# Altium PCB hub_6.PcbDoc
Units mm, origin at the board's own origin, x right, y up, seen from the top; angles counter-clockwise.
Board outline 152.4 x 101.6 mm, 2 copper layers (Top Layer, Bottom Layer); 138 components, 100 nets, 461 pads, 145 vias.
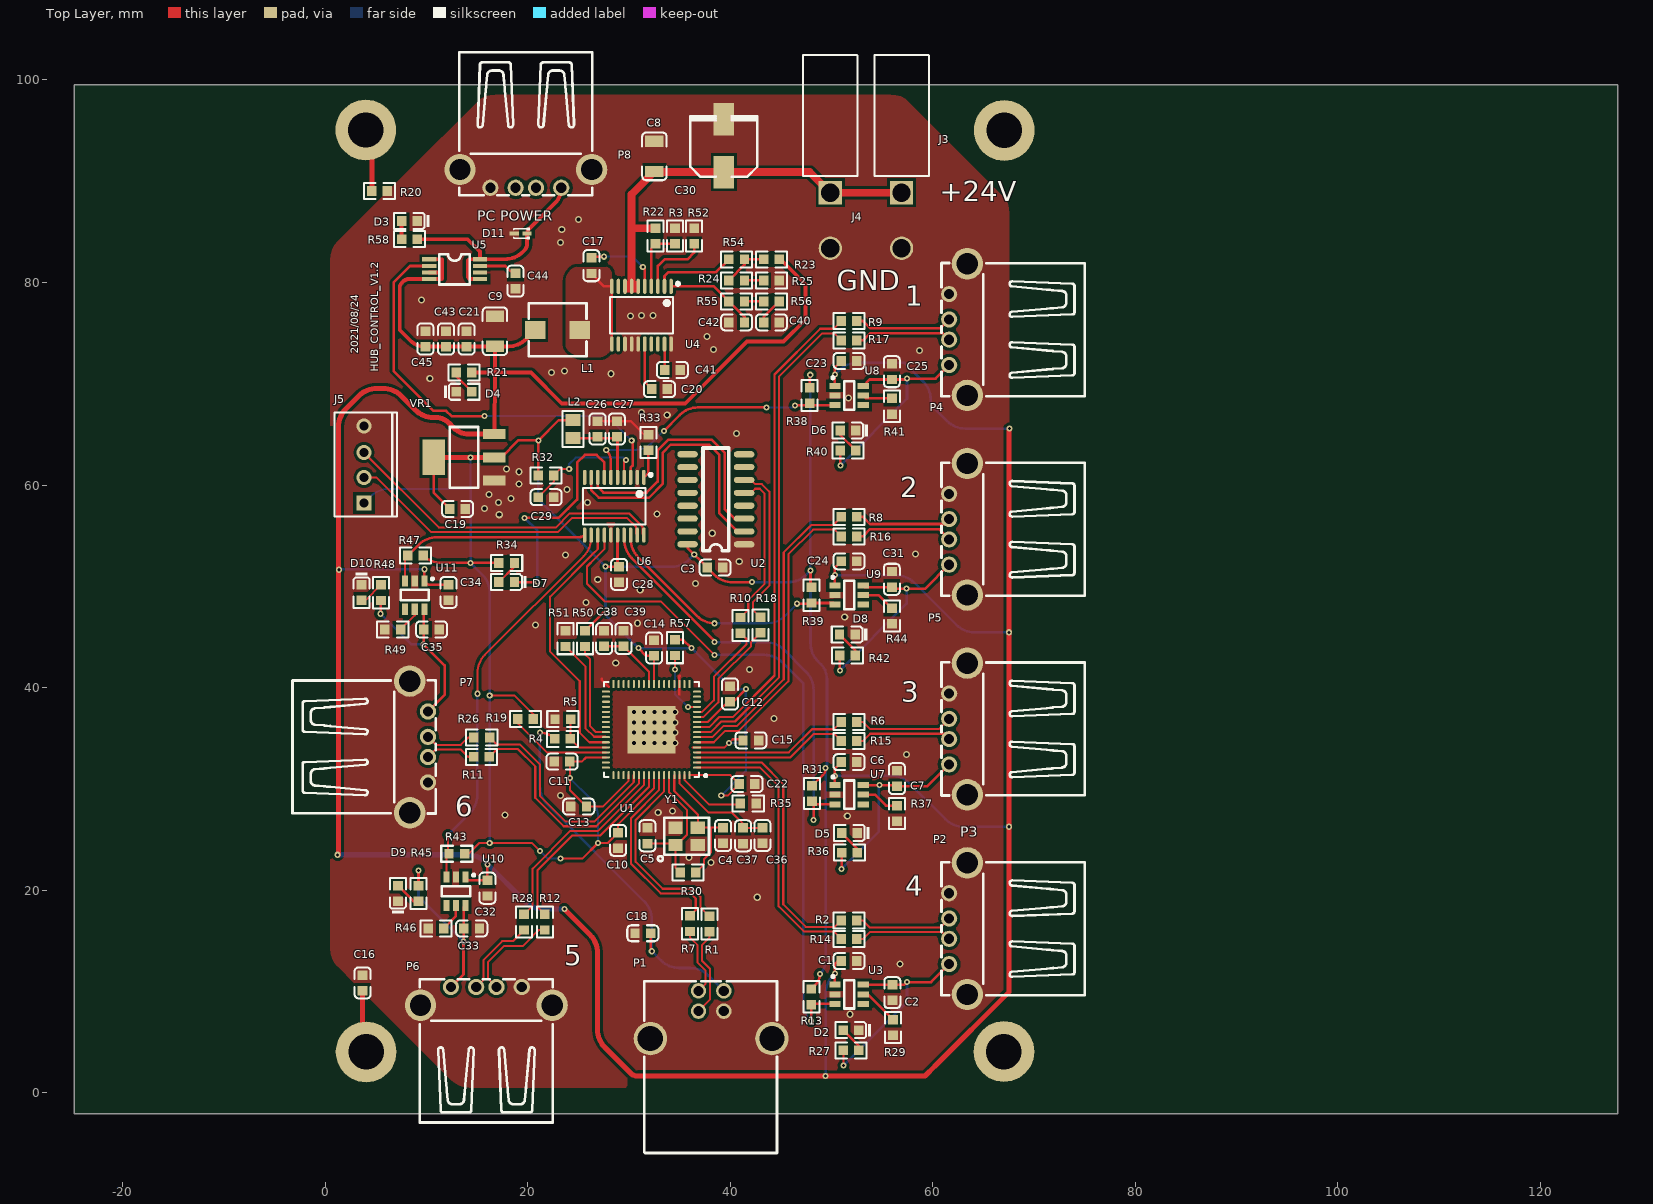
[diagram p0: Top Layer view]
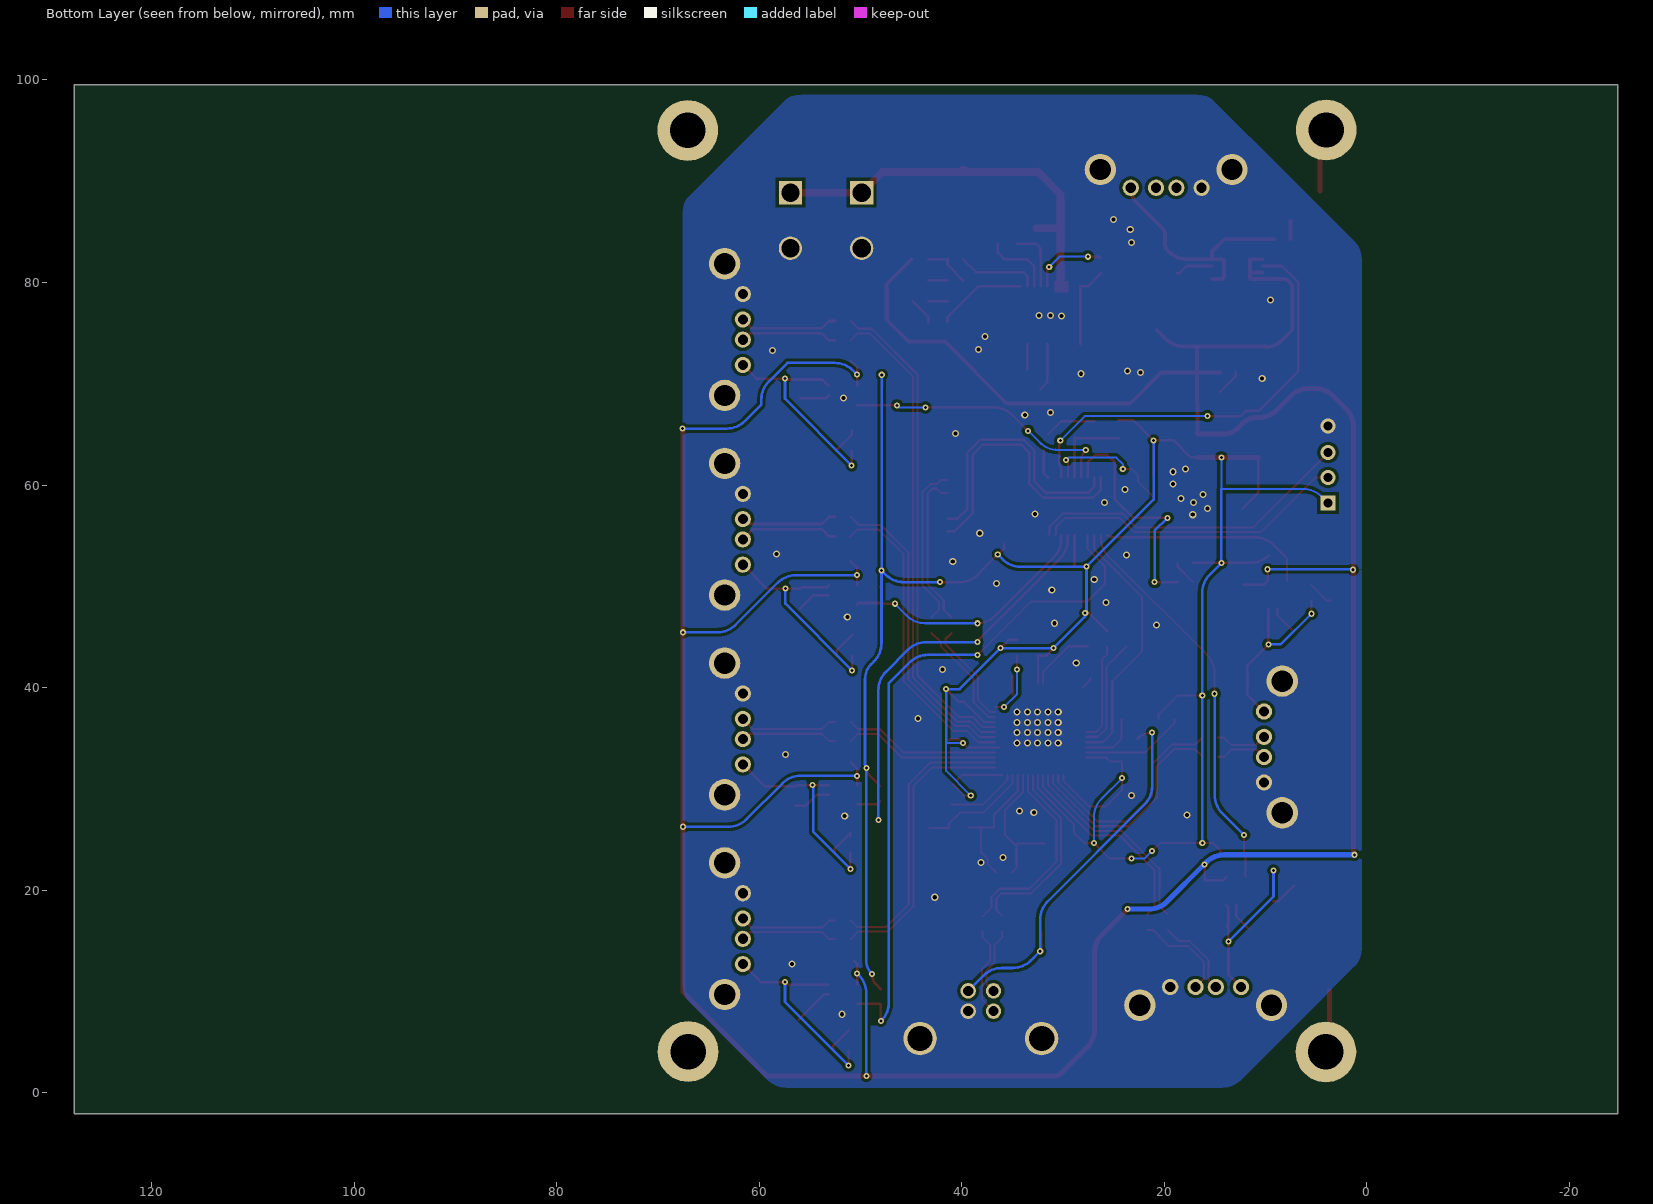
[diagram p1: Bottom Layer view, seen from below]
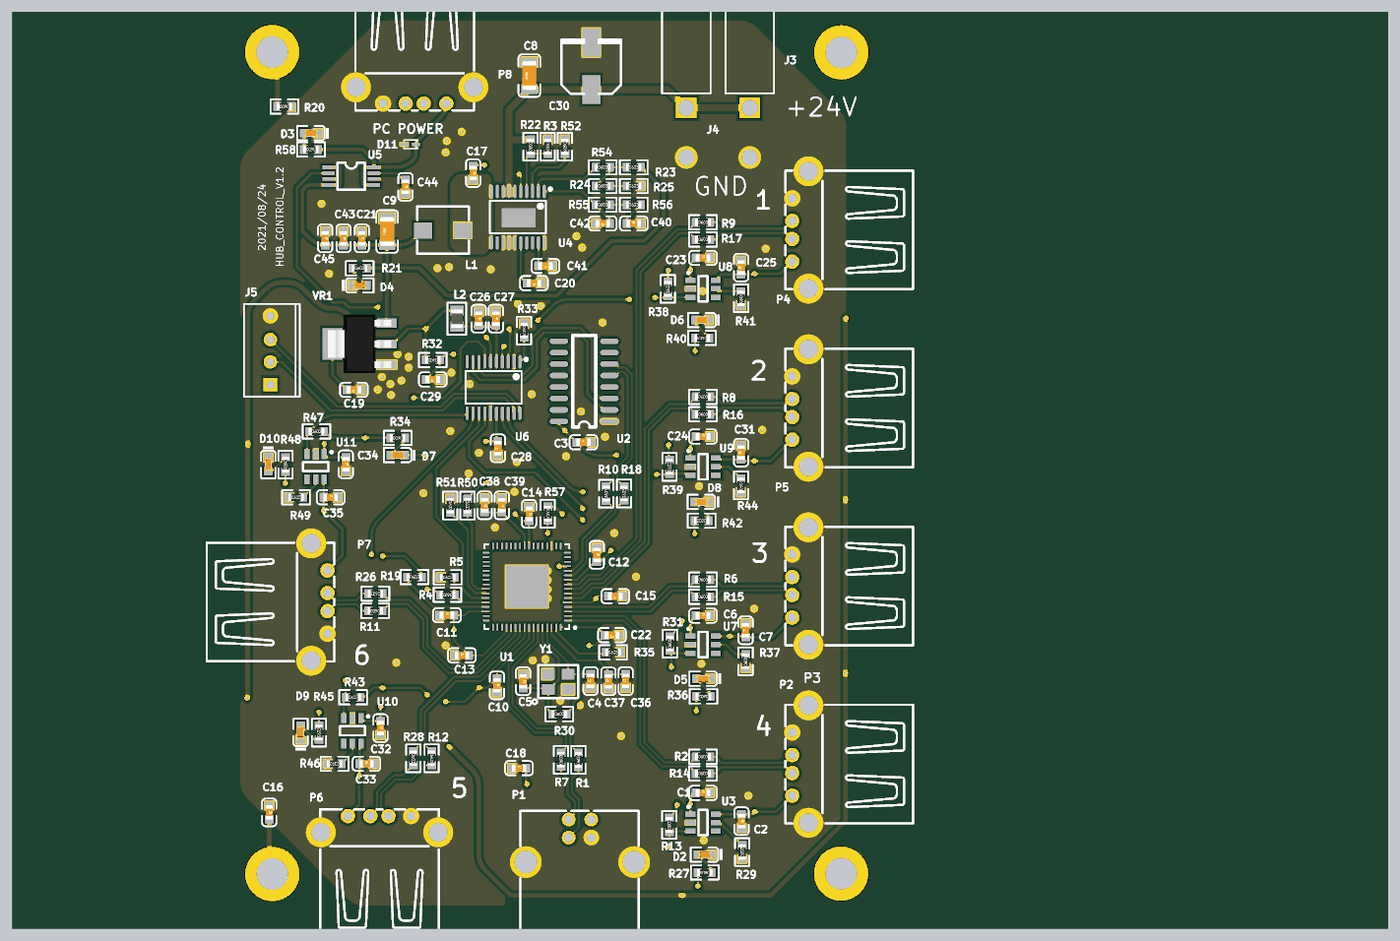
[diagram p2: 3D render of the assembled board from above, using the file's embedded part models]

## Layer stack, top to bottom
Top Layer: signal copper 0.0356
Dielectric: dielectric 0.32, FR-4, Dk 4.8
Bottom Layer: signal copper 0.0356

## Board outline
-24.765,-2.057 127.635,-2.057 127.635,99.543 -24.765,99.543

## Design rules (kind name [scope] priority, off if disabled: settings)
Clearance [InPolygon] p1: gap=0.305
Clearance Clearance_1 [All] p2: gap=0.254
PolygonConnect [All] p1: connectstyle=Direct reliefconductorwidth=0.254 reliefentries=2 polygonreliefangle="90 Angle"
RoutingVias [All] p1: holewidth=0.3 width=0.6 viastyle="Through Hole" minholewidth=0.3 minwidth=0.6 maxholewidth=0.711 maxwidth=1.27
SilkscreenOverComponentPads [All] p1: minsilkscreentomaskgap=0.254
SolderMaskExpansion [All] p1: expansion=0.102
Width [All] p1: maxlimit=1.27 minlimit=0.203 preferedwidth=0.203
27 further rules are at their usual default settings.

## Classes and differential pairs
component class RST_SER_1: C3 C8 C9 C16 C17 C19 C20 C21 C26 C27 C28 C29 C30 C40 C41 C42 C43 C44 C45 D3 D4 D7 D11 J3 J4 J5 L1 L2 P8 R3 R20 R21 R22 R23 R24 R25 R32 R33 R34 R52 R54 R55 R56 R58 U2 U4 U5 U6 VR1
component class USB2517: C1 C2 C4 C5 C6 C7 C10 C11 C12 C13 C14 C15 C18 C22 C23 C24 C25 C31 C32 C33 C34 C35 C36 C37 C38 C39 D2 D5 D6 D8 D9 D10 P1 P2 P3 P4 P5 P6 P7 R1 R2 R4 R5 R6 R7 R8 R9 R10 R11 R12 R13 R14 R15 R16 R17 R18 R19 R26 R27 R28 R29 R30 R31 R35 R36 R37 R38 R39 R40 R41 R42 R43 R44 R45 R46 R47 R48 R49 R50 R51 R57 U1 U3 U7 U8 U9 U10 U11 Y1

## Components (designator, comment, footprint, x,y, rotation, side; value= is the part's Value field where it differs from the comment)
C1 "100nF (104) 10% 50V" 0603_C 51.74,13.005 r0 top
C2 "1uF (105) 10% 50V" 0603_C 56.007,9.881 r270 top
C3 "100nF (104) 10% 50V" 0603_C 38.506,51.841 r0 top
C4 "33pF (330) 5% 50V" 0603_C 39.294,25.4 r90 top
C5 "33pF (330) 5% 50V" 0603_C 31.826,25.375 r270 top
C6 "100nF (104) 10% 50V" 0603_C 51.74,32.639 r0 top
C7 "1uF (105) 10% 50V" 0603_C 56.464,31.013 r90 top
C8 "1uF  50V" 1206_C 32.512,92.456 r90 top
C9 "22UF/25V" 1206_C 16.764,75.184 r90 top
C10 "100nF (104) 10% 50V" 0603_C 28.931,24.917 r270 top
C11 "100nF (104) 10% 50V" 0603_C 23.393,32.69 r0 top
C12 "100nF (104) 10% 50V" 0603_C 39.98,39.37 r270 top
C13 "100nF (104) 10% 50V" 0603_C 25.044,28.245 r0 top
C14 "100nF (104) 10% 50V" 0603_C 32.487,43.917 r270 top
C15 "100nF (104) 10% 50V" 0603_C 42.037,34.798 r180 top
C16 "1uF (105) 10% 50V" 0603_C 3.708,10.846 r270 top
C17 "100nF (104) 10% 50V" 0603_C 26.289,81.661 r270 top
C18 "4.7uF (475) 10% 16V" 0603_C 31.369,15.748 r0 top
C19 "100nF" 0603_C 13.081,57.658 r180 top
C20 "1uF (105) 10% 50V" 0603_C 33.02,69.469 r180 top
C21 "10uF" 0603_C 13.97,74.422 r270 top
C22 "100nF (104) 10% 50V" 0603_C 41.656,30.48 r180 top
C23 "100nF (104) 10% 50V" 0603_C 51.74,72.263 r0 top
C24 "100nF (104) 10% 50V" 0603_C 51.74,52.476 r0 top
C25 "1uF (105) 10% 50V" 0603_C 55.956,71.196 r90 top
C26 "100nF" 0603_C 26.899,65.532 r270 top
C27 "10uF" 0603_C 28.804,65.532 r270 top
C28 "100nF" 0603_C 29.032,51.181 r90 top
C29 "10nF" 0603_C 21.819,58.801 r180 top
C30 "100uf" E_6.3*5.4 39.37,90.907 r90 top
C31 "1uF (105) 10% 50V" 0603_C 55.956,50.698 r90 top
C32 "100nF (104) 10% 50V" 0603_C 16.027,20.193 r270 top
C33 "1uF (105) 10% 50V" 0603_C 14.478,16.231 r0 top
C34 "100nF (104) 10% 50V" 0603_C 12.192,49.403 r270 top
C35 "1uF (105) 10% 50V" 0603_C 10.516,45.745 r0 top
C36 "100nF (104) 10% 50V" 0603_C 43.18,25.4 r90 top
C37 "1uF (105) 10% 50V" 0603_C 41.275,25.375 r90 top
C38 "100nF (104) 10% 50V" 0603_C 27.559,44.856 r270 top
C39 "1uF (105) 10% 50V" 0603_C 29.464,44.856 r270 top
C40 "2.7nF (272) 10% 50V" 0603_C 44.069,76.073 r0 top
C41 "100nF (104) 10% 50V" 0603_C 34.29,71.374 r180 top
C42 "18pF (180) 5% 50V" 0603_C 40.64,76.073 r180 top
C43 "1uF (105) 10% 50V" 0603_C 11.938,74.422 r270 top
C44 "220nF (224) 10% 25V" 0603_C 18.796,80.137 r270 top
C45 "100nF (104) 10% 50V" 0603_C 9.906,74.422 r270 top
D2 "绿灯 0603" 0603_LED_S1 51.918,6.172 r180 top
D3 "绿灯 0603" 0603_LED_S1 8.331,86.081 r180 top
D4 "红灯 0603" 0603_LED_S1 13.716,69.215 r0 top
D5 "绿灯 0603" 0603_LED_S1 51.765,25.654 r180 top
D6 "绿灯 0603" 0603_LED_S1 51.638,65.38 r180 top
D7 "绿灯 0603" 0603_LED_S1 17.932,50.419 r180 top
D8 "绿灯 0603" 0603_LED_S1 51.562,45.237 r180 top
D9 "绿灯 0603" 0603_LED_S1 7.188,19.685 r90 top
D10 "绿灯 0603" 0603_LED_S1 3.607,49.395 r270 top
D11 "TVS" SOD-523 18.669,84.836 r0 top
J3 "MOTOR" 5557 56.921,83.388 r90 top
J4 "MOTOR" 5557 49.886,83.388 r90 top
J5 "header4" xh-4 3.835,58.217 r90 top
L1 "induct" L_SMD,5.7x5.2mm 25.146,75.311 r180 top
L2 "1uH ±10%" 0805_L 24.486,65.532 r270 top
P1 "USB1" USB-B-TH_USB-B01 39.37,10.058 r180 top
P2 "USB1" "USB-A-TH_AF90-OFFSET - duplicate" 61.62,12.7 r90 top
P3 "USB1" "USB-A-TH_AF90-OFFSET - duplicate" 61.62,32.419 r90 top
P4 "USB1" "USB-A-TH_AF90-OFFSET - duplicate" 61.62,71.857 r90 top
P5 "USB1" "USB-A-TH_AF90-OFFSET - duplicate" 61.62,52.138 r90 top
P6 "USB1" "USB-A-TH_AF90-OFFSET - duplicate" 12.421,10.439 r0 top
P7 "USB1" "USB-A-TH_AF90-OFFSET - duplicate" 10.16,37.643 r270 top
P8 "USB1" "USB-A-TH_AF90-OFFSET - duplicate" 23.317,89.357 r180 top
R1 "27Ω (27R0) ±1%" 0603_R 37.948,16.662 r90 top
R2 "27Ω (27R0) ±1%" 0603_R 51.74,17.018 r0 top
R3 "20KΩ (2002) ±1%" 0603_R 34.544,84.582 r270 top
R4 "100KΩ (1003) ±1%" 0603_R 23.444,34.95 r180 top
R5 "100KΩ (1003) ±1%" 0603_R 23.47,36.881 r0 top
R6 "27Ω (27R0) ±1%" 0603_R 51.74,36.627 r0 top
R7 "27Ω (27R0) ±1%" 0603_R 36.017,16.688 r90 top
R8 "27Ω (27R0) ±1%" 0603_R 51.74,56.871 r0 top
R9 "27Ω (27R0) ±1%" 0603_R 51.74,76.2 r0 top
R10 "27Ω (27R0) ±1%" 0603_R 41.021,46.152 r90 top
R11 "27Ω (27R0) ±1%" 0603_R 15.443,33.172 r180 top
R12 "27Ω (27R0) ±1%" 0603_R 21.692,16.84 r270 top
R13 "10KΩ (1002) ±1%" 0603_R 48.006,9.474 r90 top
R14 "27Ω (27R0) ±1%" 0603_R 51.74,15.164 r0 top
R15 "27Ω (27R0) ±1%" 0603_R 51.74,34.722 r0 top
R16 "27Ω (27R0) ±1%" 0603_R 51.74,54.94 r0 top
R17 "27Ω (27R0) ±1%" 0603_R 51.74,74.295 r0 top
R18 "27Ω (27R0) ±1%" 0603_R 43.002,46.169 r90 top
R19 "4.7KΩ (4701) ±1%" 0603_R 19.787,36.906 r0 top
R20 "1MΩ (1004) ±1%" 0603_R 5.385,89.027 r180 top
R21 "10KΩ" 0603_R 13.716,71.12 r0 top
R22 "200KΩ (2003) ±1%" 0603_R 32.639,84.582 r90 top
R23 "20KΩ (2002) ±1%" 0603_R 44.069,82.296 r0 top
R24 "2.4KΩ (2401) ±1%" 0603_R 40.64,80.222 r0 top
R25 "2.2KΩ (2201) ±1%" 0603_R 44.069,80.222 r0 top
R26 "27Ω (27R0) ±1%" 0603_R 15.469,35.077 r180 top
R27 "4.7KΩ (4701) ±1%" 0603_R 51.943,4.191 r180 top
R28 "27Ω (27R0) ±1%" 0603_R 19.66,16.84 r270 top
R29 "27KΩ (2702) ±1%" 0603_R 56.083,6.452 r90 top
R30 "1MΩ (1004) ±1%" 0603_R 35.839,21.742 r0 top
R31 "10KΩ (1002) ±1%" 0603_R 48.082,29.54 r90 top
R32 "10KΩ" 0603_R 21.819,60.96 r180 top
R33 "4.7KΩ (4701) ±1%" 0603_R 31.928,64.211 r270 top
R34 "4.7KΩ" 0603_R 17.932,52.324 r180 top
R35 "12KΩ (1202) ±1%" 0603_R 41.783,28.575 r0 top
R36 "4.7KΩ (4701) ±1%" 0603_R 51.791,23.698 r180 top
R37 "27KΩ (2702) ±1%" 0603_R 56.464,27.584 r90 top
R38 "10KΩ (1002) ±1%" 0603_R 47.854,68.834 r90 top
R39 "10KΩ (1002) ±1%" 0603_R 48.031,49.124 r90 top
R40 "4.7KΩ (4701) ±1%" 0603_R 51.638,63.398 r180 top
R41 "27KΩ (2702) ±1%" 0603_R 55.956,67.785 r90 top
R42 "4.7KΩ (4701) ±1%" 0603_R 51.587,43.155 r180 top
R43 "10KΩ (1002) ±1%" 0603_R 13.005,23.597 r0 top
R44 "27KΩ (2702) ±1%" 0603_R 55.956,47.066 r90 top
R45 "4.7KΩ (4701) ±1%" 0603_R 9.22,19.685 r90 top
R46 "27KΩ (2702) ±1%" 0603_R 10.947,16.231 r0 top
R47 "10KΩ (1002) ±1%" 0603_R 8.941,53.035 r0 top
R48 "4.7KΩ (4701) ±1%" 0603_R 5.512,49.37 r270 top
R49 "27KΩ (2702) ±1%" 0603_R 6.68,45.745 r0 top
R50 "4.7KΩ (4701) ±1%" 0603_R 25.654,44.831 r270 top
R51 "4.7KΩ (4701) ±1%" 0603_R 23.749,44.831 r270 top
R52 "56KΩ (5602) ±1%" 0603_R 36.449,84.582 r270 top
R54 "0Ω (0R0) ±1%" 0603_R 40.64,82.296 r0 top
R55 "3KΩ (3001) ±1%" 0603_R 40.64,78.147 r0 top
R56 "3KΩ (3001) ±1%" 0603_R 44.069,78.147 r0 top
R57 "4.7KΩ (4701) ±1%" 0603_R 34.544,43.942 r270 top
R58 "4.7KΩ (4701) ±1%" 0603_R 8.331,84.277 r180 top
U1 "USB2517" QFN-64 36.728,32.106 r180 top
U2 "CH340C" SOP-16 38.557,57.328 r180 top
U3 "TPS2553DBVT" SOT-23-6 52.502,8.763 r0 top
U4 "MP4575" TSSOP-20#1 34.163,79.629 r180 top
U5 "TPS22958DGKR" MSOP-8 10.287,82.296 r0 top
U6 "STM32F030F4P6" TSSOP-20#2 28.55,57.912 r180 top
U7 "TPS2553DBVT" SOT-23-6 52.502,28.473 r0 top
U8 "TPS2553DBVT" SOT-23-6 52.502,67.894 r0 top
U9 "TPS2553DBVT" SOT-23-6 52.502,48.184 r0 top
U10 "TPS2553DBVT" SOT-23-6 11.963,19.126 r270 top
U11 "TPS2553DBVT" SOT-23-6 7.899,48.387 r270 top
VR1 "ZLDO1117QG33TA" SOT-223 13.716,62.738 r0 top
Y1 "OSC-24M" SMD-3225_4P 36.03,25.146 r0 top

## Footprints (in the part's own frame and the unit in brackets; to place one, negate y for a bottom-side part, rotate by r counter-clockwise, add the part's x,y. Pads: shape width x height; smd on the part's side, far side on the other; paste and mask are expansions set on the pad)
0603_C [mm]
  rect 0.93x0.98 smd: 1(-0.77,0) 2(0.77,0)
  silkscreen extent -1.53,-0.79 1.54,0.79, body extent -0.8,-0.4 0.8,0.4, height 0.3
0603_LED_S1 [mm]
  rect 0.93x0.98 smd: A(0.77,0) K(-0.77,0)
  silkscreen extent -1.98,-0.79 1.54,0.79, body extent -0.8,-0.4 0.8,0.4, height 0.6
0603_R [mm]
  rect 0.93x0.98 smd: 1(-0.77,0) 2(0.77,0)
  silkscreen extent -1.53,-0.79 1.54,0.79, body extent -0.85,-0.4 0.85,0.4, height 0.56
0805_L [mm]
  rect 1.16x1.47 smd: 1(-0.89,0) 2(0.89,0)
  silkscreen extent -1.77,-1.04 1.77,1.03, body extent -1.02,-0.64 1.03,0.64, height 0.6
1206_C [mm]
  rect 1.13x1.8 smd: 1(-1.49,0) 2(1.49,0)
  silkscreen extent -2.36,-1.2 2.35,1.2, body extent -1.6,-0.81 1.6,0.79, height 1
5557 [mm]
  rect 2.3x2.3 hole 1.8: 1(5.486,0)
  round 2.3 hole 1.8: 2(0,0)
  silkscreen extent 7.11,-2.69 19.1,2.69
E_6.3*5.4 [mm]
  rect 3.2x2 smd: 1(0,0) 2(5.207,0)
  silkscreen extent -0.47,-3.3 5.53,3.3
L_SMD,5.7x5.2mm [mm]
  rect 2x1.8 smd: 1(0,0) 2(4.4,0)
  silkscreen extent -0.66,-2.64 5.05,2.6
MSOP-8 [mil]
  rect 55x16 smd: 1(0,0) 2(0,-26) 3(0,-51) 4(0,-77) 5(197,-77) 6(197,-51) 7(197,-26) 8(197,0)
  silkscreen extent 39,-98 158,20
QFN-64 [mm]
  oval 0.8x0.2 smd: 1(0,0) 2(0,-0.5) 3(0,-1) 4(0,-1.5) 5(0,-2) 6(0,-2.5) 7(0,-3) 8(0,-3.5) 9(0,-4) 10(0,-4.5) 11(0,-5) 12(0,-5.5) 13(0,-6) 14(0,-6.5) 15(0,-7) 16(0,-7.5) 33(9,-7.5) 34(9,-7) 35(9,-6.5) 36(9,-6) 37(9,-5.5) 38(9,-5) 39(9,-4.5) 40(9,-4) 41(9,-3.5) 42(9,-3) 43(9,-2.5) 44(9,-2) 45(9,-1.5) 46(9,-1) 47(9,-0.5) 48(9,0)
  oval 0.2x0.8 smd: 17(0.75,-8.25) 18(1.25,-8.25) 19(1.75,-8.25) 20(2.25,-8.25) 21(2.75,-8.25) 22(3.25,-8.25) 23(3.75,-8.25) 24(4.25,-8.25) 25(4.75,-8.25) 26(5.25,-8.25) 27(5.75,-8.25) 28(6.25,-8.25) 29(6.75,-8.25) 30(7.25,-8.25) 31(7.75,-8.25) 32(8.25,-8.25) 49(8.25,0.75) 50(7.75,0.75) 51(7.25,0.75) 52(6.75,0.75) 53(6.25,0.75) 54(5.75,0.75) 55(5.25,0.75) 56(4.75,0.75) 57(4.25,0.75) 58(3.75,0.75) 59(3.25,0.75) 60(2.75,0.75) 61(2.25,0.75) 62(1.75,0.75) 63(1.25,0.75) 64(0.75,0.75)
  rect 4.7x4.7 smd: 65(4.5,-3.75)
  silkscreen extent -0.98,-8.45 9.2,0.95, body extent -0.05,-8.3 9.05,0.8, height 1
SMD-3225_4P [mm]
  rect 1.4x1.2 smd: 1(-1.425,-0.686) 2(0.775,-0.686) 3(0.775,1.014) 4(-1.425,1.014)
  silkscreen extent -3.17,-2.29 1.88,2.01
SOD-523 [mm]
  rect 0.93x0.36 smd: 1(0,0) 2(1.27,0)
  silkscreen extent -0.04,-0.55 1.54,0.55
SOP-16 [mil]
  oval 80x24 smd: 1(-111,125) 2(-111,75) 3(-111,25) 4(-111,-25) 5(-111,-75) 6(-111,-125) 7(-111,-175) 8(-111,-225) 9(109,-225) 10(109,-175) 11(109,-125) 12(109,-75) 13(109,-25) 14(109,25) 15(109,75) 16(109,125)
  silkscreen extent -51,-250 49,150
SOT-23-6 [mm]
  rect 1.1x0.6 smd: 1(-2.159,1.905) 2(-2.159,0.955) 3(-2.159,0.005) 4(0.641,0.005) 5(0.641,0.955) 6(0.641,1.905)
  silkscreen extent -2.48,-0.45 -0.26,2.83
SOT-223 [mm]
  rect 2.2x1 smd: 1(3,-2.3) 2(3,0) 3(3,2.3)
  rect 2.2x3.5 smd: 2(-3,0)
  silkscreen extent -1.4,-3 1.4,3, body extent -3.49,-3.24 3.49,3.24, height 1.64
TSSOP-20#1 [mm]
  oval 0.35x1.5 smd: 1(0,0) 2(0.65,0) 3(1.3,0) 4(1.95,0) 5(2.6,0) 6(3.25,0) 7(3.9,0) 8(4.55,0) 9(5.2,0) 10(5.85,0) 11(5.85,5.7) 12(5.2,5.7) 13(4.55,5.7) 14(3.9,5.7) 15(3.25,5.7) 16(2.6,5.7) 17(1.95,5.7) 18(1.3,5.7) 19(0.65,5.7) 20(0,5.7)
  silkscreen extent -0.83,-0.4 6.02,4.65
TSSOP-20#2 [mm]
  oval 0.35x1.5 smd: 1(-2.925,-2.85) 2(-2.275,-2.85) 3(-1.625,-2.85) 4(-0.975,-2.85) 5(-0.325,-2.85) 6(0.325,-2.85) 7(0.975,-2.85) 8(1.625,-2.85) 9(2.275,-2.85) 10(2.925,-2.85) 11(2.925,2.85) 12(2.275,2.85) 13(1.625,2.85) 14(0.975,2.85) 15(0.325,2.85) 16(-0.325,2.85) 17(-0.975,2.85) 18(-1.625,2.85) 19(-2.275,2.85) 20(-2.925,2.85)
  silkscreen extent -3.75,-3.25 3.1,1.8
"USB-A-TH_AF90-OFFSET - duplicate" [mm]
  round 3.1 hole 2.1: 0(-3,-1.8) 0(10,-1.8)
  round 1.6 hole 1: 1(0,0) 2(2.5,0) 3(4.5,0) 4(7,0)
  silkscreen extent -3.07,-13.38 10.07,0.75
USB-B-TH_USB-B01 [mm]
  round 3.3 hole 2.5: 0(-4.75,4.71) 0(7.25,4.71)
  round 1.524 hole 1: 1(0,0) 2(2.5,0) 3(2.5,2) 4(0,2)
  silkscreen extent -5.25,-0.95 7.85,16.01
xh-4 [mm]
  rect 1.5x1.5 hole 0.9: 1(0,0)
  round 1.5 hole 0.9: 2(2.525,0) 3(5,0) 4(7.62,0)
  silkscreen extent -1.32,-3.25 8.94,2.92

## Part data
C1 C3 C6 C10 C11 C12 C13 C14 C15 C17 C19 C22 C23 C24 C26 C28 C32 C34 C36 C38 C41 C45: library part "0603 100nF (104) 10% 50V", "Ì"
C2 C7 C16 C20 C25 C31 C33 C35 C37 C39 C43: library part "0603 1uF (105) 10% 50V", "Ì"
C4 C5: library part "0603 33pF (330) 5% 50V", "Ì"
C8: library part "1206 1uF (105) 10% 50V", "Ì"
C9: library part "1206 10uF (106) 10% 50V", "Ì"
C18: library part "0603 4.7uF (475) 10% 16V", "Ì"
C21 C27: library part "0603 10uF (106) 10% 10V", "Ì"
C29: library part "0603 10nF (103) 10% 50V", "Ì"
C40: library part "0603 2.7nF (272) 10% 50V", "Ì"
C42: library part "0603 18pF (180) 5% 50V", "Ì"
C44: library part "0603 220nF (224) 10% 25V", "Ì"
D2 D3 D5 D6 D7 D8 D9 D10: library part "0603 绿灯"
D4: library part "0603 红灯"
L2: library part "0805 100uH 10%", "贴Æ"
R1 R2 R6 R7 R8 R9 R10 R11 R12 R14 R15 R16 R17 R18 R26 R28: library part "0603 27Ω (27R0) 1%"
R3 R23: library part "0603 20KΩ (2002) 1%"
R4 R5: library part "0603 100KΩ (1003) 1%"
R13 R21 R31 R32 R38 R39 R43 R47: library part "0603 10KΩ (1002) 1%"
R19 R27 R33 R36 R40 R42 R45 R48 R50 R51 R57 R58: library part "0603 4.7KΩ (4701) 1%"
R20 R30: library part "0603 1MΩ (1004) 1%"
R22: library part "0603 200KΩ (2003) 1%"
R24: library part "0603 2.4KΩ (2401) 1%"
R25: library part "0603 2.2KΩ (2201) 1%"
R29 R37 R41 R44 R46 R49: library part "0603 27KΩ (2702) 1%"
R34: library part "0603 1KΩ (1001) 1%"
R35: library part "0603 12KΩ (1202) 1%"
R52: library part "0603 56KΩ (5602) 1%"
R54: library part "0603 0Ω (0R0) 1%"
R55 R56: library part "0603 3KΩ (3001) 1%"
U1: library part US
U5: library part TPS
VR1: library part "SOT-223 AMS1117-3.3", "低压差线性Î"
Y1: "SM"

## Free pads (board coordinates)
  round 6 hole 3.5: 0(4.025,95.06) 0(4.051,4.025) 0(67.031,4.064) 0(67.056,95.021)

## Via types
v1: diameter 0.7, hole 0.4, Top Layer to Bottom Layer, 74 vias
v2: diameter 0.6, hole 0.3, Top Layer to Bottom Layer, 71 vias

## Nets (pads, with @x,y where several pads share a name; then routed paths per layer and width w, separated by ;. In a path a pad name is that pad's centre, name@x,y a point inside that pad or via, vN(x,y) a via of type N, cw(c..) or ccw(c..) an arc to the next point about the centre after c; other vN are vias at no path point)
GND: C1.2 C2.2 C3.2 C4.1 C5.1 C6.2 C7.2 C8.2 C9.2 C10.2 C11.1 C12.1 C13.1 C14.1 C15.1 C16.1 C18.1 C19.1 C20.1 C21.1 C22.1 C23.2 C24.2 C25.2 C26.1 C27.1 C28.1 C29.1 C30.2 C31.2 C32.2 C33.2 C34.2 C35.2 C36.1 C37.1 C38.1 C39.1 C40.2 C41.1 C42.2 C43.1 C44.2 C45.1 D2.K D3.K D4.K D5.K D6.K D8.K D9.K D10.K D11.1 J3.2 J4.2 J5.4 P1.0 P1.4 P2.0 P2.4 P3.0 P3.4 P4.0 P4.4 P5.0 P5.4 P6.0 P6.4 P7.0 P7.4 P8.0 P8.4 R3.1 R5.1 R20.1 R25.2 R29.1 R33.1 R35.2 R37.1 R41.1 R44.1 R46.1 R49.1 R51.1 R52.1 U1.19 U1.65 U2.1 U3.2 U4.13 U4.14 U4.15 U4.20 U5.6 U6.2 U6.15 U7.2 U8.2 U9.2 U10.2 U11.2 VR1.1 Y1.2 Y1.4 | length 8
  Top Layer w0.203: C26.1 C27.1 30.201,66.302 R33.1@31.471,65.032
  Top Layer w0.254: 27.305,40.894 27.305,40.779 27.997,40.087 ; 34.976,39.345 34.978,39.347 U1.19 34.978,41.125 35.001,41.148
  other v1: 51.816,7.747 56.769,12.7 42.672,19.304 38.1,22.733 35.941,23.241 51.562,27.305 17.78,27.432 32.893,27.686 34.29,27.813 23.241,29.337 57.404,33.401 30.48,34.544 31.496,34.544 32.512,34.544 33.528,34.544 34.544,34.544 30.48,35.56 31.496,35.56 32.512,35.56 33.528,35.56 34.544,35.56 30.48,36.576 31.496,36.576 32.512,36.576 33.528,36.576 34.544,36.576 44.323,36.957 30.48,37.592 31.496,37.592 32.512,37.592 33.528,37.592 34.544,37.592 41.91,41.783 28.702,42.418 20.777,46.203 30.861,46.355 51.308,46.99 25.781,48.387 31.115,49.657 36.576,50.292 26.924,50.673 40.894,52.451 23.749,53.086 58.293,53.213 38.227,55.245 17.196,57.074 32.766,57.15 15.723,57.683 17.12,58.293 25.908,58.293 18.339,58.674 16.18,59.08 23.876,59.563 19.152,60.096 19.152,61.316 17.907,61.595 40.615,65.1 33.782,66.929 31.242,67.183 51.689,68.58 10.338,70.51 28.245,70.993 22.352,71.12 23.622,71.247 58.674,73.279 38.354,73.406 37.719,74.676 30.175,76.708 31.242,76.733 32.385,76.733 9.5,78.257 23.241,83.947 23.368,85.217 25.019,86.233
GND_PAD0: pad.0@4.025,95.06 R20.2 | length 6.2
  Top Layer w0.508: pad.0@4.025,95.06 cw(c2.602,93.637) 4.615,93.637 R20.2
GND_PAD1: C16.2 pad.0@4.051,4.025 | length 6.1
  Top Layer w0.508: C16.2 3.708,4.852 ccw(c4.877,4.852) pad.0@4.051,4.025
LED1: D7.K U6.7 | length 23.7
  Top Layer w0.254: D7.K 20.828,50.419 20.955,50.292 v2(20.955,50.419) ; v2(19.685,56.769) 23.055,56.769 23.969,57.683 24.003,57.683 24.892,58.572 24.892,62.23 25.654,62.992 26.797,62.992 27.575,62.214 U6.7
  Bottom Layer w0.254: v2(19.685,56.769) 20.955,55.499 v2(20.955,50.419)
NetC4_2: C4.2 R30.2 U1.61 Y1.3 | length 13.7
  Top Layer w0.203: U1.61 34.478,29.795 36.805,27.469 Y1.3 36.814,26.17 38.1,26.17 ; R30.2 37.394,22.527 37.394,23.025 38.1,23.731 38.1,26.17 ; C4.2 38.1,26.17
NetC5_2: C5.2 R30.1 U1.60 Y1.1 | length 13.9
  Top Layer w0.203: C5.2 34.46,24.605 Y1.1 ; U1.60 33.978,29.649 35.749,27.878 35.749,25.502 34.708,24.46 Y1.1 ; R30.1 34.605,22.207 Y1.1
NetC17_1: C17.1 U4.5 | length 7.5
  Top Layer w0.254: C17.1 26.408,82.55 v2(27.559,82.55) ; v2(31.369,81.534) 31.563,81.34 U4.5
  Bottom Layer w0.203: v2(27.559,82.55) 30.353,82.55 v2(31.369,81.534)
NetC17_2: C17.2 L1.1 U4.10 U4.11 | length 8.2
  Top Layer w0.254: C17.2 27.551,79.629 U4.10 U4.11
NetC20_2: C20.2 U4.16 | length 4.7
  Top Layer w0.254: U4.16 31.563,70.156 C20.2
NetC40_1: C40.1 R56.2 | length 2.7
  Top Layer w0.254: C40.1 43.299,76.607 R56.2
NetC41_2: C41.2 U4.19 | length 2.6
  Top Layer w0.254: U4.19 33.52,73.922 C41.2
NetC42_1: C42.1 R55.1 U4.1 | length 9
  Top Layer w0.254: U4.1 38.388,79.629 R55.1 41.41,76.607 C42.1
NetC44_1: C44.1 U5.7 | length 3.8
  Top Layer w0.254: U5.7 17.805,81.636 18.534,80.907 C44.1
NetD2_A: D2.A R27.1 | length 2.6
  Top Layer w0.254: D2.A 52.713,4.607 R27.1
NetD3_A: D3.A R58.2 | length 1.8
  Top Layer w0.381: R58.2 D3.A
NetD4_A: D4.A R21.1 | length 2.5
  Top Layer w0.254: R21.1 12.946,70.755 D4.A
NetD5_A: D5.A R36.1 | length 3
  Top Layer w0.203: D5.A@50.995,25.264 D5.A
  Top Layer w0.254: D5.A 52.561,24.089 R36.1
NetD6_A: D6.A R40.1 | length 2.6
  Top Layer w0.254: D6.A 50.868,64.938 R40.1
NetD7_A: D7.A R34.1 | length 2.5
  Top Layer w0.203: D7.A 18.702,51.959 R34.1
NetD8_A: D8.A R42.1 | length 2.7
  Top Layer w0.254: D8.A 52.357,43.672 R42.1
NetD9_A: D9.A R45.1 | length 2.7
  Top Layer w0.254: D9.A 8.728,18.915 R45.1
NetD10_A: D10.A R48.1 | length 2.5
  Top Layer w0.203: D10.A 3.997,48.625 R48.1
NetR1_2: R1.2 U1.59 | length 19.8
  Top Layer w0.203: U1.59 33.478,29.753 30.658,26.933 30.658,22.809 33.325,20.142 36.283,20.142 37.059,19.366 37.059,18.321 R1.2
NetR2_1: R2.1 U1.2 | length 28.2
  Top Layer w0.203: U1.2 43.098,32.606 45.237,30.466 45.237,18.593 47.447,16.383 50.335,16.383 R2.1
NetR3_2: R3.2 R22.1 U4.4 | length 6.3
  Top Layer w0.254: U4.4 32.213,83.386 R22.1 R3.2
NetR6_1: R6.1 U1.4 | length 15.5
  Top Layer w0.203: U1.4 45.798,33.606 48.082,35.89 50.233,35.89 R6.1
NetR7_2: R7.2 U1.58 | length 19.7
  Top Layer w0.203: U1.58 32.978,29.9 30.201,27.122 30.201,22.62 33.135,19.685 36.093,19.685 36.601,19.177 36.601,18.042 R7.2
NetR8_1: R8.1 U1.7 | length 30.6
  Top Layer w0.203: U1.7 38.23,35.106 39.319,36.195 40.665,36.195 45.288,40.818 45.288,53.352 47.994,56.058 50.157,56.058 R8.1
NetR9_1: R9.1 U1.9 | length 48.3
  Top Layer w0.203: U1.9 37.937,36.106 38.94,37.109 40.287,37.109 44.374,41.197 44.374,70.917 48.895,75.438 50.208,75.438 R9.1
NetR10_1: R10.1 U1.12 | length 10.3
  Top Layer w0.203: U1.12 37.236,37.606 38.379,38.749 38.379,41.058 41.605,44.284 41.605,44.798 R10.1
NetR11_1: R11.1 U1.54 | length 22.6
  Top Layer w0.203: R11.1 16.975,33.934 19.05,33.934 20.752,32.233 20.752,29.122 23.56,26.314 26.774,26.314 30.978,30.519 U1.54
NetR12_1: R12.1 U1.56 | length 20.2
  Top Layer w0.203: R12.1 20.955,18.347 20.955,21.946 24.409,25.4 27.153,25.4 31.978,30.226 U1.56
NetR14_1: R14.1 U1.1 | length 28.2
  Top Layer w0.203: U1.1 42.951,32.106 44.78,30.277 44.78,18.403 47.258,15.926 50.208,15.926 R14.1
NetR15_1: R15.1 U1.3 | length 15.5
  Top Layer w0.203: U1.3 45.944,33.106 48.272,35.433 50.259,35.433 R15.1
NetR16_1: R16.1 U1.6 | length 30.6
  Top Layer w0.203: U1.6 38.376,34.606 39.509,35.738 40.855,35.738 45.745,40.628 45.745,53.162 48.184,55.601 50.309,55.601 R16.1
NetR17_1: R17.1 U1.8 | length 48.2
  Top Layer w0.203: U1.8 38.083,35.606 39.13,36.652 40.476,36.652 44.831,41.007 44.831,70.727 49.084,74.981 50.284,74.981 R17.1
NetR18_1: R18.1 U1.11 | length 11.3
  Top Layer w0.203: U1.11 37.383,37.106 38.837,38.559 38.837,40.869 42.062,44.094 42.062,44.526 42.367,44.831 42.434,44.831 R18.1
NetR19_1: R19.1 U1.45 | length 10.3
  Top Layer w0.203: R19.1 19.017,36.482 21.893,33.606 U1.45
NetR23_1: R23.1 R24.1 R54.2 | length 4.6
  Top Layer w0.254: R24.1 41.41,81.762 R54.2 R23.1
NetR24_2: R24.2 R25.1 | length 1.9
  Top Layer w0.254: R24.2 R25.1
NetR26_1: R26.1 U1.53 | length 21.8
  Top Layer w0.203: R26.1 16.924,34.392 19.239,34.392 21.209,32.422 21.209,29.312 23.749,26.772 26.584,26.772 30.478,30.666 U1.53
NetR28_1: R28.1 U1.55 | length 20.2
  Top Layer w0.203: R28.1 20.498,18.448 20.498,22.135 24.22,25.857 26.963,25.857 31.478,30.372 U1.55
NetR29_2: R29.2 U3.5 | length 4
  Top Layer w0.254: U3.5 53.587,9.718 R29.2
NetR33_2: R33.2 U6.1 | length 2.9
  Top Layer w0.254: U6.1 31.928,61.215 R33.2
NetR35_1: R35.1 U1.63 | length 7.1
  Top Layer w0.203: U1.63 35.478,30.911 37.942,28.448 40.886,28.448 R35.1
NetR37_2: R37.2 U7.5 | length 3.8
  Top Layer w0.254: U7.5 54.29,29.428 55.364,28.354 R37.2
NetR41_2: R41.2 U8.5 | length 2.9
  Top Layer w0.254: U8.5 53.412,68.58 55.931,68.58 R41.2
NetR44_2: R44.2 U9.5 | length 3.4
  Top Layer w0.254: U9.5 54.654,49.139 R44.2
NetR46_2: R46.2 U10.5 | length 2.8
  Top Layer w0.254: R46.2 12.918,17.432 U10.5
NetR49_2: R49.2 U11.5 | length 2.6
  Top Layer w0.203: R49.2 8.854,47.15 U11.5
NetR50_2: R50.2 U1.41 | length 9.9
  Top Layer w0.203: R50.2 25.654,43.307 26.162,42.799 26.162,36.195 26.751,35.606 U1.41
NetR51_2: R51.2 U1.42 | length 11.3
  Top Layer w0.203: R51.2 25.705,42.105 25.705,36.006 26.562,35.148 27.686,35.148 U1.42
NetR52_2: R52.2 U4.3 | length 7
  Top Layer w0.254: U4.3 32.863,81.631 33.528,82.296 35.763,82.296 36.433,82.966 R52.2@36.433,83.812
NetR54_1: R54.1 U4.2 | length 8
  Top Layer w0.254: U4.2 33.513,80.63 33.909,81.026 38.6,81.026 R54.1
NetR55_2: R55.2 R56.1 | length 1.9
  Top Layer w0.254: R55.2 R56.1
NetR57_2: R57.2 U1.13 | length 6.5
  Top Layer w0.203: v2(34.544,41.783) R57.2 ; v2(35.814,38.1) 36.723,38.1 U1.13
  Bottom Layer w0.203: v2(34.544,41.783) 34.544,39.37 v2(35.814,38.1)
NRST: C29.2 R32.1 U6.4 | length 12.8
  Top Layer w0.203: C29.2 22.589,60.341 R32.1 23.224,61.595 v2(24.105,61.595) ; U6.4 29.525,62.316 v2(29.693,62.484)
  Bottom Layer w0.203: v2(24.105,61.595) 24.105,62.078 24.74,62.713 29.464,62.713 v2(29.693,62.484)
PC_ON: U5.2 U6.3 | length 43
  Top Layer w0.254: U5.2 8.402,81.636 6.77,80.003 6.77,71.284 10.723,67.331 11.956,67.331 12.485,66.802 v2(15.748,66.802) ; U6.3 30.175,61.721 30.374,61.92 30.374,63.597 30.378,63.602 30.378,64.287 v2(30.277,64.389)
  Bottom Layer w0.203: v2(15.748,66.802) 27.864,66.802 v2(30.277,64.389)
RESET_N: U1.43 U6.13 | length 25.6
  Top Layer w0.203: 26.502,53.245 26.501,53.246 26.491,53.246 ; U6.13 26.925,53.679 26.491,53.246 ; U1.43 26.1,34.606 25.146,35.56 25.146,40.64 22.225,43.561 22.225,48.98 26.491,53.246
RX: U2.2 U6.9 | length 27.6
  Top Layer w0.254: U6.9 26.275,59.501 27.026,58.75 31.96,58.75 33.35,60.14 33.35,63.213 34.119,63.983 37.94,63.983 38.938,62.985 38.938,57.201 40.716,55.423 U2.2
SWCLK: J5.3 U6.20 | length 32.6
  Top Layer w0.203: J5.3 11.234,55.818 11.241,55.818 11.246,55.813 11.392,55.813 11.401,55.804 22.772,55.804 24.169,57.201 30.011,57.201 31.355,55.857 31.355,55.181 U6.20
SWDIO: J5.2 U6.19 | length 30.9
  Top Layer w0.203: J5.2 5.095,60.742 10.49,55.347 10.503,55.347 10.518,55.361 11.052,55.361 11.052,55.356 11.203,55.356 11.212,55.347 22.962,55.347 24.359,56.744 29.818,56.744 30.705,55.857 30.705,55.181 U6.19
TX: U2.3 U6.8 | length 26.1
  Top Layer w0.254: U6.8 26.925,59.816 27.483,59.258 31.75,59.258 32.842,60.35 32.842,63.424 33.909,64.491 38.151,64.491 39.446,63.195 39.446,57.658 40.411,56.693 U2.3
USB+5V: C18.2 P1.1 R4.2 | length 37.9
  Top Layer w0.254: v2(21.209,35.56) cw(c21.209,33.494) 22.67,34.955 R4.2 ; C18.2 32.139,14.257 ccw(c32.545,14.257) v2(32.258,13.97)
  Bottom Layer w0.254: v2(21.209,35.56) 21.209,30.262 ccw(c23.749,30.262) 21.953,28.466 31.514,18.905 cw(c29.718,17.109) 32.258,17.109 v2(32.258,13.97) 33.165,13.063 ccw(c34.961,14.859) 34.961,12.319 36.057,12.319 cw(c36.057,9.779) 37.853,11.575 P1.1
USB_DET: R4.1 R5.2 U1.44 | length 5.8
  Top Layer w0.203: R5.2 24.214,36.855 R4.1 25.059,34.106 U1.44
USB_EX1_5V: C2.1 P2.1 R27.2 U3.6 | length 21.7
  Top Layer w0.203: R27.2 51.173,2.7 v2(51.181,2.692)
  Top Layer w0.254: U3.6 53.16,10.651 C2.1 57.183,10.651 v2(57.455,10.922) 59.842,10.922 P2.1
  Bottom Layer w0.254: v2(51.181,2.692) 57.455,8.966 v2(57.455,10.922)
USB_EX1_EN: R13.1 U3.3 U6.14 | length 68.4
  Top Layer w0.203: U6.14 27.575,53.671 26.691,52.788 26.68,52.788 25.857,51.966 25.857,50.241 27.584,48.514 33.147,48.514 v2(38.43,43.231)
  Top Layer w0.254: v2(47.981,7.087) ccw(c47.919,7.148) 48.006,7.148 R13.1 cw(c48.16,8.55) 48.16,8.768 U3.3
  Bottom Layer w0.254: v2(38.43,43.231) 43.347,43.231 cw(c43.347,40.691) 45.143,42.487 47.193,40.437 47.193,8.926 ccw(c49.733,8.926) 47.937,7.13 v2(47.981,7.087)
USB_EX2_5V: C7.1 P3.1 R36.2 U7.6 | length 20.9
  Top Layer w0.203: v2(51.003,22.098) v2@51.021,22.115 ; C7.1@56.329,30.378 C7.1
  Top Layer w0.254: v2(51.003,22.098) 51.003,23.681 R36.2 ; U7.6 v2(54.736,30.378) C7.1@56.329,30.378 ; C7.1 59.445,30.243 P3.1
  Bottom Layer w0.254: v2(51.003,22.098) 54.686,25.781 54.686,30.329 v2(54.736,30.378)
USB_EX2_EN: R31.1 U6.17 U7.3 | length 43.3
  Top Layer w0.254: U6.17 29.525,54.611 ccw(c32.065,54.611) 30.269,52.815 ; 30.269,52.815 38.322,44.761 cw(c38.062,44.501) v2(38.43,44.501) ; v2(48.235,26.949) 48.235,28.402 ccw(c47.714,28.402) R31.1 48.374,28.478 U7.3
  Bottom Layer w0.254: v2(38.43,44.501) 43.499,44.501 cw(c43.499,41.961) 45.296,43.757 47.491,41.562 cw(c45.695,39.766) 48.235,39.766 v2(48.235,26.949)
USB_EX3_5V: C31.1 P5.1 R42.2 U9.6 | length 21.8
  Top Layer w0.254: R42.2 50.817,41.715 v2(50.825,41.707) ; U9.6 53.303,49.928 55.804,49.928 55.948,49.784 v2(57.429,49.784) 59.267,49.784 P5.1
  Bottom Layer w0.254: v2(50.825,41.707) 57.429,48.311 v2(57.429,49.784)
USB_EX3_EN: R39.1 U6.18 U9.3 | length 25.3
  Top Layer w0.254: U6.18 30.175,54.679 ccw(c32.715,54.679) 30.919,52.883 36.734,47.068 ccw(c38.456,48.79) v2(38.456,46.355) ; v2(46.609,48.285) 47.867,48.285 ccw(c47.867,48.518) R39.1 50.178,48.354 U9.3
  Bottom Layer w0.203: v2(38.456,46.355) 43.626,46.355 ccw(c43.626,48.895) 45.423,47.099 v2(46.609,48.285) v2@46.507,48.285
USB_EX4_5V: C25.1 P4.1 R40.2 U8.6 | length 22.1
  Top Layer w0.254: R40.2 50.868,61.959 v2(50.876,61.951) ; U8.6 53.77,70.426 C25.1 57.371,70.426 v2(57.455,70.51) 60.274,70.51 P4.1
  Bottom Layer w0.254: v2(50.876,61.951) 57.455,68.529 v2(57.455,70.51)
USB_EX4_EN: R38.1 U6.6 U8.3 | length 27.3
  Top Layer w0.254: v2(27.762,63.475) cw(c26.646,62.358) 28.225,62.358 U6.6 ; v2(33.452,65.354) 35.019,66.922 cw(c36.815,65.126) 36.815,67.666 v2(43.586,67.666) v2@43.586,67.716 ; v2(46.406,67.869) 47.945,67.869 ccw(c47.945,67.973) R38.1@48.018,67.899 ; R38.1 R38.1@48.018,67.899 ; U8.3 R38.1@48.018,67.899
  Bottom Layer w0.203: v2(27.762,63.475) 30.52,63.475 ccw(c30.52,66.015) 32.316,64.219 v2(33.452,65.354) ; v2(43.586,67.666) 46.099,67.666 ccw(c46.099,68.099) 46.406,67.793 v2(46.406,67.869)
USB_EX5_5V: C35.1 P7.1 R48.2 U11.6 | length 18.5
  Top Layer w0.254: v2(5.486,47.295) 5.512,47.32 R48.2 ; U11.6 9.746,47.687 C35.1 9.746,44.29 v2(9.728,44.272) 11.811,42.189 11.811,39.294 P7.1
  Bottom Layer w0.254: v2(5.486,47.295) 8.509,44.272 v2(9.728,44.272)
USB_EX5_EN: R47.1 U6.11 U11.3 | length 20.8
  Top Layer w0.203: U11.3 7.904,52.769 R47.1
  Top Layer w0.254: R47.1 9.256,54.12 cw(c11.052,52.324) 11.052,54.864 25.147,54.864 ccw(c25.147,55.54) U6.11
USB_EX6_5V: C33.1 P6.1 R45.2 U10.6 | length 19.2
  Top Layer w0.203: C33.1 C33.1@13.868,16.391
  Top Layer w0.254: R45.2 v2(9.22,21.946) ; P6.1 13.665,11.684 v2(13.665,14.935) 13.708,14.978 C33.1 13.708,18.325 U10.6
  Bottom Layer w0.254: v2(9.22,21.946) 9.22,19.38 v2(13.665,14.935)
USB_EX6_EN: R43.1 U6.12 U10.3 | length 39.4
  Top Layer w0.203: U10.3 11.968,23.33 R43.1 cw(c12.461,23.823) 12.141,23.823 v2(12.141,25.451) ; v2(15.037,39.395) 15.037,41.442 cw(c17.577,41.442) 15.781,43.238 25.531,52.988 ccw(c23.735,54.784) 26.275,54.784 U6.12
  Bottom Layer w0.254: v2(12.141,25.451) 14.293,27.602 ccw(c12.497,29.399) 15.037,29.399 v2(15.037,39.395)
USB_UP+: P1.3 R1.1 | length 8.9
  Top Layer w0.203: P1.3 37.998,9.187 37.998,12.268 37.211,13.056 37.211,14.58 37.948,15.316 R1.1
USB_UP-: P1.2 R7.1 | length 6.8
  Top Layer w0.203: R7.1 36.017,15.342 36.754,14.605 36.754,12.866 37.541,12.079 37.541,10.73 P1.2
USBDN1+: P2.3 R2.2 | length 9.8
  Top Layer w0.203: R2.2 53.086,17.018 53.785,16.319 60.74,16.319 P2.3
USBDN1-: P2.2 R14.2 | length 9.7
  Top Layer w0.203: R14.2 53.086,15.164 53.785,15.862 60.958,15.862 P2.2
USBDN2+: P3.3 R6.2 | length 9.8
  Top Layer w0.203: R6.2 53.086,36.627 53.81,35.903 60.604,35.903 P3.3
USBDN2-: P3.2 R15.2 | length 9.6
  Top Layer w0.203: R15.2 53.086,34.722 53.81,35.446 61.094,35.446 P3.2
USBDN3+: P5.3 R8.2 | length 9.6
  Top Layer w0.254: R8.2 53.111,56.871 53.823,56.159 61.142,56.159 P5.3
USBDN3-: P5.2 R16.2 | length 9.8
  Top Layer w0.254: R16.2 53.111,54.94 53.823,55.651 60.607,55.651 P5.2
USBDN4+: P4.3 R9.2 | length 9.8
  Top Layer w0.254: R9.2 53.111,76.2 53.81,75.501 60.765,75.501 P4.3
USBDN4-: P4.2 R17.2 | length 9.7
  Top Layer w0.254: R17.2 53.111,74.295 53.81,74.993 60.983,74.993 P4.2
USBDN5+: R10.2 U2.5 | length 15.6
  Top Layer w0.203: R10.2 41.783,47.684 41.783,48.627 43.409,50.253 43.409,59.157 42.926,59.639 42.469,59.639 42.062,59.233 U2.5
USBDN5-: R18.2 U2.6 | length 16.4
  Top Layer w0.203: U2.6 42.062,60.503 42.469,60.096 43.115,60.096 43.866,59.346 43.866,50.063 42.24,48.438 42.24,47.701 R18.2
USBDN6+: P7.3 R11.2 | length 5.1
  Top Layer w0.203: P7.3 10.913,33.896 13.373,33.896 14.097,33.172 R11.2
USBDN6-: P7.2 R26.2 | length 5.2
  Top Layer w0.203: P7.2 10.949,34.353 13.399,34.353 14.122,35.077 R26.2
USBDN7+: P6.3 R12.2 | length 9.7
  Top Layer w0.203: P6.3 16.104,11.256 16.104,12.929 17.678,14.503 19.551,14.503 20.505,15.458 20.505,15.493 21.082,16.07 R12.2
USBDN7-: P6.2 R28.2 | length 8.2
  Top Layer w0.203: P6.2 15.646,11.165 15.646,13.118 17.489,14.961 18.55,14.961 R28.2
VCC3V3: C3.1 C10.1 C11.2 C12.2 C13.2 C14.2 C15.2 C19.2 C22.2 C28.2 J5.1 L2.1 R13.2 R19.2 R31.2 R32.2 R34.2 R38.2 R39.2 R43.2 R47.2 R50.1 R57.1 U1.5 U1.10 U1.24 U1.46 U1.52 U1.57 U1.64 U2.16 U6.16 VR1.2 | length 307.2
  Top Layer w0.203: R43.2 14.173,23.597 15.24,24.663 16.195,24.663 cw(c16.195,24.577) v2(16.256,24.638) 20.447,24.638 v2(21.209,23.876) ; v2(16.256,39.243) 18.69,39.243 20.557,37.376 R19.2 ; v2(23.241,23.114) 25.4,23.114 v2(26.949,24.663) 27.907,24.663 C10.1 28.931,26.518 32.478,30.065 U1.57 ; U1.46 25.765,33.106 25.349,32.69 C11.2 v2(24.163,31.064) 24.163,29.896 C13.2 27.411,28.245 29.978,30.812 U1.52 ; U1.24 32.478,43.138 C14.2 ; U1.64 40.01,31.356 C22.2@40.505,30.861 ; 36.278,34.106 U1.5 39.457,34.106 v2(39.895,34.544) 40.255,34.904 41.161,34.904 C15.2 ; U1.10 37.79,36.606 39.784,38.6 C12.2 ; v2(39.116,29.337) 39.743,29.337 C22.2
  Top Layer w0.254: R47.2 ccw(c11.428,54.752) 11.428,52.324 v2(14.351,52.324) R34.2 ; VR1.2@10.716,62.738 10.716,59.253 C19.2 ; VR1.2@16.716,62.738 17.399,62.738 19.069,64.408 v2(21.059,64.408) ; R32.2 v2@21.049,64.384 ; L2.1 L2.1 23.071,66.421 v2(21.059,64.408) ; R50.1 27.424,47.371 v2(27.813,47.371) ; v2(27.686,51.943) 29.024,51.943 C28.2 28.875,52.109 U6.16 ; v2(30.93,43.899) 31.69,43.138 C14.2@32.478,43.138 ; R57.1 35.349,44.712 v2(36.162,43.899) ; U2.16 35.789,53.789 C3.1 38.44,51.138 ccw(c40.236,52.934) 40.236,50.394 42.139,50.394 v2(42.164,50.419) ; C12.2 40.302,38.6 v2(41.554,39.853) ; R38.2 47.854,70.769 cw(c48.027,70.769) v2(47.904,70.891) ; v2(47.93,51.562) 47.93,50.139 ccw(c48.277,50.139) R39.2 ; R13.2 48.444,10.682 ccw(c47.417,11.709) v2(48.87,11.709) ; R31.2 49.147,31.375 ccw(c48.467,32.055) v2(49.428,32.055) ; v2@21.049,64.384 cw(c21.083,64.384) v2(21.059,64.408) ; v2@21.049,64.384 21.049,64.398 v2(21.059,64.408)
  Top Layer w0.508: VR1.2@10.716,62.738 v2(14.376,62.738) VR1.2@16.716,62.738
  Bottom Layer w0.203: J5.1 4.488,58.87 cw(c6.285,57.074) 6.285,59.614 14.376,59.614 14.376,62.586 v2(14.376,62.738) ; v2(21.209,23.876) 21.971,23.114 v2(23.241,23.114) ; v2(24.163,31.064) 26.205,29.022 cw(c24.409,27.226) 26.949,27.226 v2(26.949,24.663) ; v2(39.116,29.337) 41.554,31.775 41.554,34.544 v2(39.895,34.544)
  Bottom Layer w0.254: 14.376,59.614 14.376,52.385 cw(c14.29,52.385) v2(14.351,52.324) 15.512,51.163 cw(c13.716,49.367) 16.256,49.367 v2(16.256,39.243) v2(16.256,24.638) ; v2@14.376,62.586 14.224,62.738 v2(14.376,62.738) ; v2(21.059,64.408) 21.059,58.57 v2(27.686,51.943) ; v2(36.449,53.137) 35.999,52.687 cw(c34.203,54.483) 34.203,51.943 v2(27.686,51.943) ; 41.554,34.544 v2(41.554,39.853) 40.208,39.853 v2(36.162,43.899) v2(30.93,43.899) 27.813,47.015 v2(27.813,47.371) 27.686,47.498 v2(27.686,51.943) ; v2(42.164,50.419) 45.735,50.419 ccw(c45.735,52.959) 47.531,51.163 v2(47.93,51.562) ; v2(47.904,70.891) 47.904,51.623 ccw(c47.991,51.623) v2(47.93,51.562) ; v2(48.87,11.709) ccw(c47.521,13.058) 49.428,13.058 v2(49.428,32.055) ccw(c49.122,32.361) 49.555,32.361 49.555,40.881 ccw(c47.561,40.881) 48.971,42.291 48.674,42.588 cw(c50.47,44.385) 47.93,44.385 v2(47.93,51.562)
VCC5V: C1.1 C6.1 C9.1 C21.2 C23.1 C24.1 C32.1 C34.1 C43.2 C45.2 L1.2 R21.2 R23.2 U3.1 U5.1 U5.3 U5.4 U7.1 U8.1 U9.1 U10.1 U11.1 VR1.3 | length 377.9
  Top Layer w0.254: v2(9.804,51.689) U11.1 10.177,50.173 C34.1 ; U10.1 14.191,20.963 C32.1 16.027,22.494 cw(c16.114,22.494) v2(16.053,22.555) ; U3.1 v2(50.343,11.786) 50.343,12.708 C1.1@50.64,13.005 ; U7.1 v2(50.343,31.293) 50.343,32.012 C6.1 ; U9.1 v2(50.343,51.105) 50.343,51.849 C24.1 ; U8.1 v2(50.343,70.917) 50.343,71.636 C23.1
  Top Layer w0.381: U5.3 11.496,81.001 ccw(c11.496,81.087) 11.557,81.026 ; U5.1 11.557,82.296 11.557,81.026 ; R21.2 16.764,71.12 ; VR1.3@16.764,65.154 cw(c16.6,65.154) VR1.3 16.764,71.12 ; L1.2 19.873,74.438 cw(c18.077,76.234) 18.077,73.694 C9.1 ; R23.2@44.958,82.296 47.422,79.832 47.422,76.327 45.263,74.168 41.656,74.168 35.56,68.072 23.368,68.072 20.32,71.12 16.764,71.12 ; 11.557,81.026 11.557,80.391 cw(c11.434,80.514) 11.434,80.34 U5.4 8.238,80.34 ccw(c8.238,79.646) 7.747,80.137 7.567,79.957 ccw(c8.054,79.471) 7.366,79.471 7.366,75.311 8.402,74.275 ccw(c9.906,75.779) C45.2 cw(c10.007,73.551) 10.007,73.694 C9.1 ; 16.764,71.12 C9.1
  Top Layer w0.508: v2@1.321,23.495 1.321,65.75 cw(c3.861,65.75) 2.065,67.546 3.32,68.801 cw(c5.116,67.005) 5.116,69.545 5.73,69.545 cw(c5.73,67.005) 7.526,68.801 8.908,67.419 ccw(c10.704,69.215) 10.704,66.675 10.922,66.675 cw(c10.922,64.835) 12.223,66.136 12.7,65.659 ccw(c14.199,67.158) 14.199,65.038 VR1.3 ; v2(23.622,18.136) 26.155,15.603 cw(c24.359,13.807) 26.899,13.807 26.899,6.259 ccw(c29.439,6.259) 27.643,4.463 30.201,1.905 ccw(c30.814,2.518) 30.814,1.651 v2(49.428,1.651) 59.233,1.651 60.249,2.667 ; 60.282,2.7 67.513,9.931 v2(67.513,26.264) v2(67.513,45.466) v2@67.513,65.583
  Bottom Layer w0.254: v2(1.372,51.638) cw(c1.494,51.516) 1.494,51.689 v2(9.804,51.689) ; v2@15.857,22.751 v2(16.053,22.555) ; v2(49.428,1.651) 49.428,9.819 cw(c51.968,9.819) 50.172,11.615 v2(50.343,11.786) ; v2(50.343,31.293) 55.92,31.293 cw(c55.92,28.753) 57.716,30.549 61.257,27.008 ccw(c63.054,28.804) 63.054,26.264 v2(67.513,26.264) ; v2(50.343,51.105) 56.377,51.105 cw(c56.377,48.565) 58.173,50.361 62.324,46.21 ccw(c64.12,48.006) 64.12,45.466 v2(67.513,45.466) ; v2(50.343,70.917) 50.742,71.316 cw(c52.538,69.52) 52.538,72.06 57.226,72.06 59.048,70.238 cw(c57.252,68.442) 59.792,68.442 59.792,67.945 61.41,66.327 ccw(c63.206,68.123) 63.206,65.583 v2(67.589,65.583)
  Bottom Layer w0.508: v2(1.245,23.495) 14.061,23.495 cw(c14.061,20.955) v2@15.857,22.751 ; v2(16.053,22.555) 19.728,18.88 ccw(c21.525,20.676) 21.525,18.136 v2(23.622,18.136)
VCC24V: C8.1 C30.1 J3.1 J4.1 R22.2 U4.6 U4.7 U4.8 | length 40.5
  Top Layer w0.762: U4.7 30.263,85.344 ; R22.2 30.271,85.352 30.263,85.344 ; C30.1@39.922,91.135 ccw(c39.922,90.355) C30.1 ; J3.1 J4.1 47.854,90.907 C30.1 ; 30.263,85.344 30.263,88.717 C8.1 32.571,90.907 C30.1
VDD18: C38.2 C39.2 U1.25 | length 6.7
  Top Layer w0.203: C38.2 C39.2 31.978,41.572 U1.25
VDD18PLL: C36.2 C37.2 U1.62 | length 11.1
  Top Layer w0.203: U1.62 34.978,30.554 37.846,27.686 40.132,27.686 41.275,26.543 C37.2 43.155,26.145 C36.2
VDDA: C26.2 C27.2 L2.2 U6.5 | length 8.4
  Top Layer w0.254: L2.2 28.684,64.642 C27.2 28.875,64.691 U6.5
VOUT: D11.2 P8.1 R58.1 U5.5 U5.8 | length 23.8
  Top Layer w0.381: R58.1 14.072,84.277 15.291,83.058 U5.8 ; U5.5 14.347,80.34 cw(c14.347,80.514) 14.224,80.391 cw(c14.531,80.698) 14.097,80.698 14.097,82.169 cw(c14.404,81.862) 14.404,82.296 U5.8 ; P8.1 cw(c21.171,89.357) 22.689,87.84 20.119,85.27 ccw(c20.552,84.836) D11.2 19.939,83.798 cw(c19.072,83.798) 19.685,83.185 19.54,83.04 cw(c17.744,84.836) 17.744,82.296 U5.8
pads on no net: P8.2 P8.3 U1.14 U1.15 U1.16 U1.17 U1.18 U1.20 U1.21 U1.22 U1.23 U1.26 U1.27 U1.28 U1.29 U1.30 U1.31 U1.32 U1.33 U1.34 U1.35 U1.36 U1.37 U1.38 U1.39 U1.40 U1.47 U1.48 U1.49 U1.50 U1.51 U2.4 U2.7 U2.8 U2.9 U2.10 U2.11 U2.12 U2.13 U2.14 U2.15 U3.4 U4.9 U4.12 U4.17 U4.18 U6.10 U7.4 U8.4 U9.4 U10.4 U11.4

## Polygon pours and split planes (outlines as drawn)
NetC17_2 on Top Layer "Bottom Layer-No Net" (solid, remove dead copper, pour order 4): 28.313,73.929 28.313,79.629 28.313,80.813 ccw(c27.473,80.813) 28.067,81.407 ccw(c27.76,81.1) 27.76,81.534 26.67,81.534 24.87,81.534 ccw(c24.87,80.667) 24.257,81.28 ccw(c25.483,80.054) 23.749,80.054 23.749,77.851 23.749,73.892 ccw(c24.616,73.892) 24.003,73.279 ccw(c25.536,74.812) 25.536,72.644 25.908,72.644 27.2,72.644 ccw(c27.2,73.511) 27.813,72.898 27.938,73.023 ccw(c27.031,73.929) 28.313,73.929
GND on Top Layer "Bottom Layer-No Net" (solid, remove dead copper, pour order 6): 0.508,18.288 0.508,14.224 ccw(c2.961,14.224) 1.226,12.49 6.604,7.112 12.464,1.252 ccw(c14.26,3.048) 14.26,0.508 16.764,0.508 57.368,0.508 ccw(c57.368,3.048) 59.164,1.252 65.532,7.62 66.82,8.908 ccw(c65.024,10.704) 67.564,10.704 67.564,12.7 67.564,86.832 ccw(c65.024,86.832) 66.82,88.628 60.452,94.996 57.64,97.808 ccw(c55.844,96.012) 55.844,98.552 51.308,98.552 16.8,98.552 ccw(c16.8,96.012) 15.004,97.808 8.128,90.932 1.252,84.056 ccw(c3.048,82.26) 0.508,82.26 0.508,80.772 0.508,17.78
GND on Bottom Layer "Bottom Layer-No Net" (solid, remove dead copper, pour order 5): 0.508,18.288 0.508,14.224 ccw(c2.961,14.224) 1.226,12.49 6.604,7.112 12.464,1.252 ccw(c14.26,3.048) 14.26,0.508 16.764,0.508 57.368,0.508 ccw(c57.368,3.048) 59.164,1.252 65.532,7.62 66.82,8.908 ccw(c65.024,10.704) 67.564,10.704 67.564,12.7 67.564,86.832 ccw(c65.024,86.832) 66.82,88.628 60.452,94.996 57.64,97.808 ccw(c55.844,96.012) 55.844,98.552 51.308,98.552 16.8,98.552 ccw(c16.8,96.012) 15.004,97.808 8.128,90.932 1.252,84.056 ccw(c3.048,82.26) 0.508,82.26 0.508,80.772 0.508,17.78

## Other copper
Top Layer:
  rectangle net VCC24V: 29.464,78.994 30.861,80.137
  pour cut-out: 35.941,30.734 38.227,28.448 38.854,28.448 40.386,29.98 40.378,29.988 40.378,30.988 40.259,30.988 39.37,31.877 39.116,31.623 36.322,31.623 36.322,31.115
  pour cut-out: 27.813,55.499 27.813,56.642 27.432,57.023 23.749,57.023 23.749,56.134 22.962,55.347 23.571,54.737 27.051,54.737
  pour cut-out: 26.525,39.939 26.552,39.967 28.028,39.967 28.028,36.918 26.543,35.433 26.525,35.451
  pour cut-out: 33.02,48.768 33.528,49.276 38.303,44.501 37.897,44.501 37.592,44.196 33.147,48.641 33.147,48.877
  pour cut-out: 33.02,48.768 33.528,49.276 37.846,44.958 38.1,44.958 38.1,44.704 37.592,44.196 33.147,48.641 33.147,48.759
  pour cut-out: 24.968,44.907 24.638,44.577 24.638,39.878 25.654,38.862 25.908,39.116 26.162,39.116 26.162,44.831 26.035,44.958 25.984,44.907
  pour cut-out: 29.834,1.539 cw(c29.809,1.513) 29.845,1.513 29.845,0.254 60.289,0.254 ccw(c60.289,2.794) 62.085,0.998 62.865,1.778 ccw(c62.558,2.085) 62.992,2.085 62.992,4.191 62.081,4.191 ccw(c62.081,3.324) 61.468,3.937 59.272,1.741 cw(c59.055,1.958) 59.055,1.651 54.207,1.651 ccw(c54.207,0.784) 53.594,1.397 ccw(c53.252,1.055) 53.252,1.539
Bottom Layer:
  pour cut-out: 37.934,46.139 37.934,43.076 cw(c37.847,43.076) 37.908,43.015 cw(c38.001,42.922) 38.001,43.053 43.942,43.053 cw(c43.942,42.44) 44.376,42.873 47.879,39.37 ccw(c49.632,37.617) 47.153,37.617 47.153,7.546 cw(c47.153,7.395) 47.26,7.502 48.197,6.565 cw(c48.292,6.47) 48.292,6.604 49.428,6.604 49.428,41.086 ccw(c46.888,41.086) 48.684,42.883 48.458,43.109 cw(c49.734,44.385) 47.93,44.385 47.93,48.768 cw(c47.623,49.075) 47.623,48.641 46.482,48.641 cw(c45.869,48.641) 46.302,48.207 44.831,46.736 cw(c43.911,47.656) 43.911,46.355 38.456,46.355 ccw(c38.456,45.617)

## Silkscreen, mask and mechanical layers (free items; w line width, h text height)
Top Overlay:
  text "+24V" at 60.706,88.011 h2
  text "PC POWER" at 15.011,86.081 h1
  text "GND" at 50.546,79.248 h2
  text "1" at 57.277,77.724 h2
  text "2021/08/24" at 3.277,72.974 h0.76 r90
  text "HUB_CONTROL_V1.2" at 5.258,71.196 h0.76 r90
  text "2" at 56.769,58.801 h2
  text "3" at 56.896,38.608 h2
  text "6" at 12.827,27.305 h2
  text "4" at 57.277,19.431 h2
  text "5" at 23.622,12.573 h2
Top Paste:
  rectangle: 29.464,75.667 33.223,77.749
Top Solder:
  rectangle: 29.464,75.667 33.223,77.749
Mechanical 1:
  lines w0.2: 0,0 0,99.035 71.044,99.035 71.044,0 0,0